# Altium PCB PCB2.PcbDoc
Units mm, origin at the board's own origin, x right, y up, seen from the top; angles counter-clockwise.
Board outline 150.26 x 100.27 mm, 2 copper layers (Top Layer, Bottom Layer); 57 components, 48 nets, 195 pads, 0 vias.
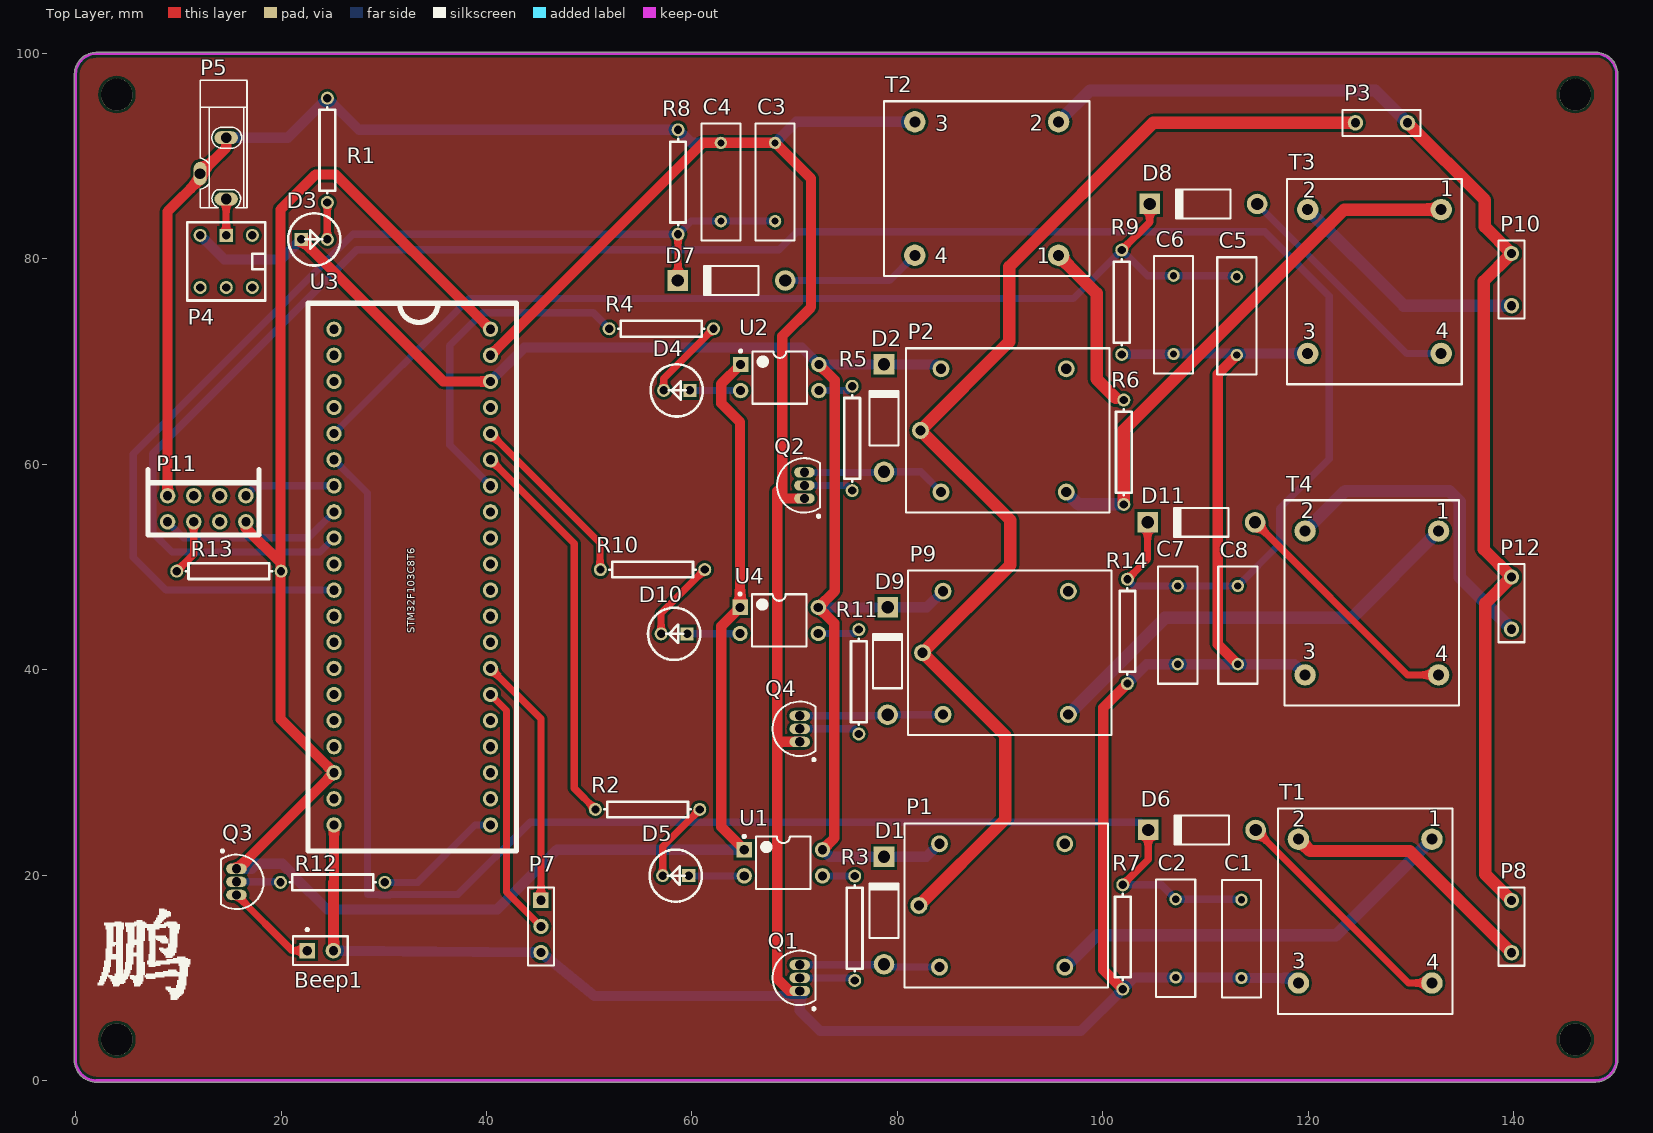
[diagram p0: Top Layer view]
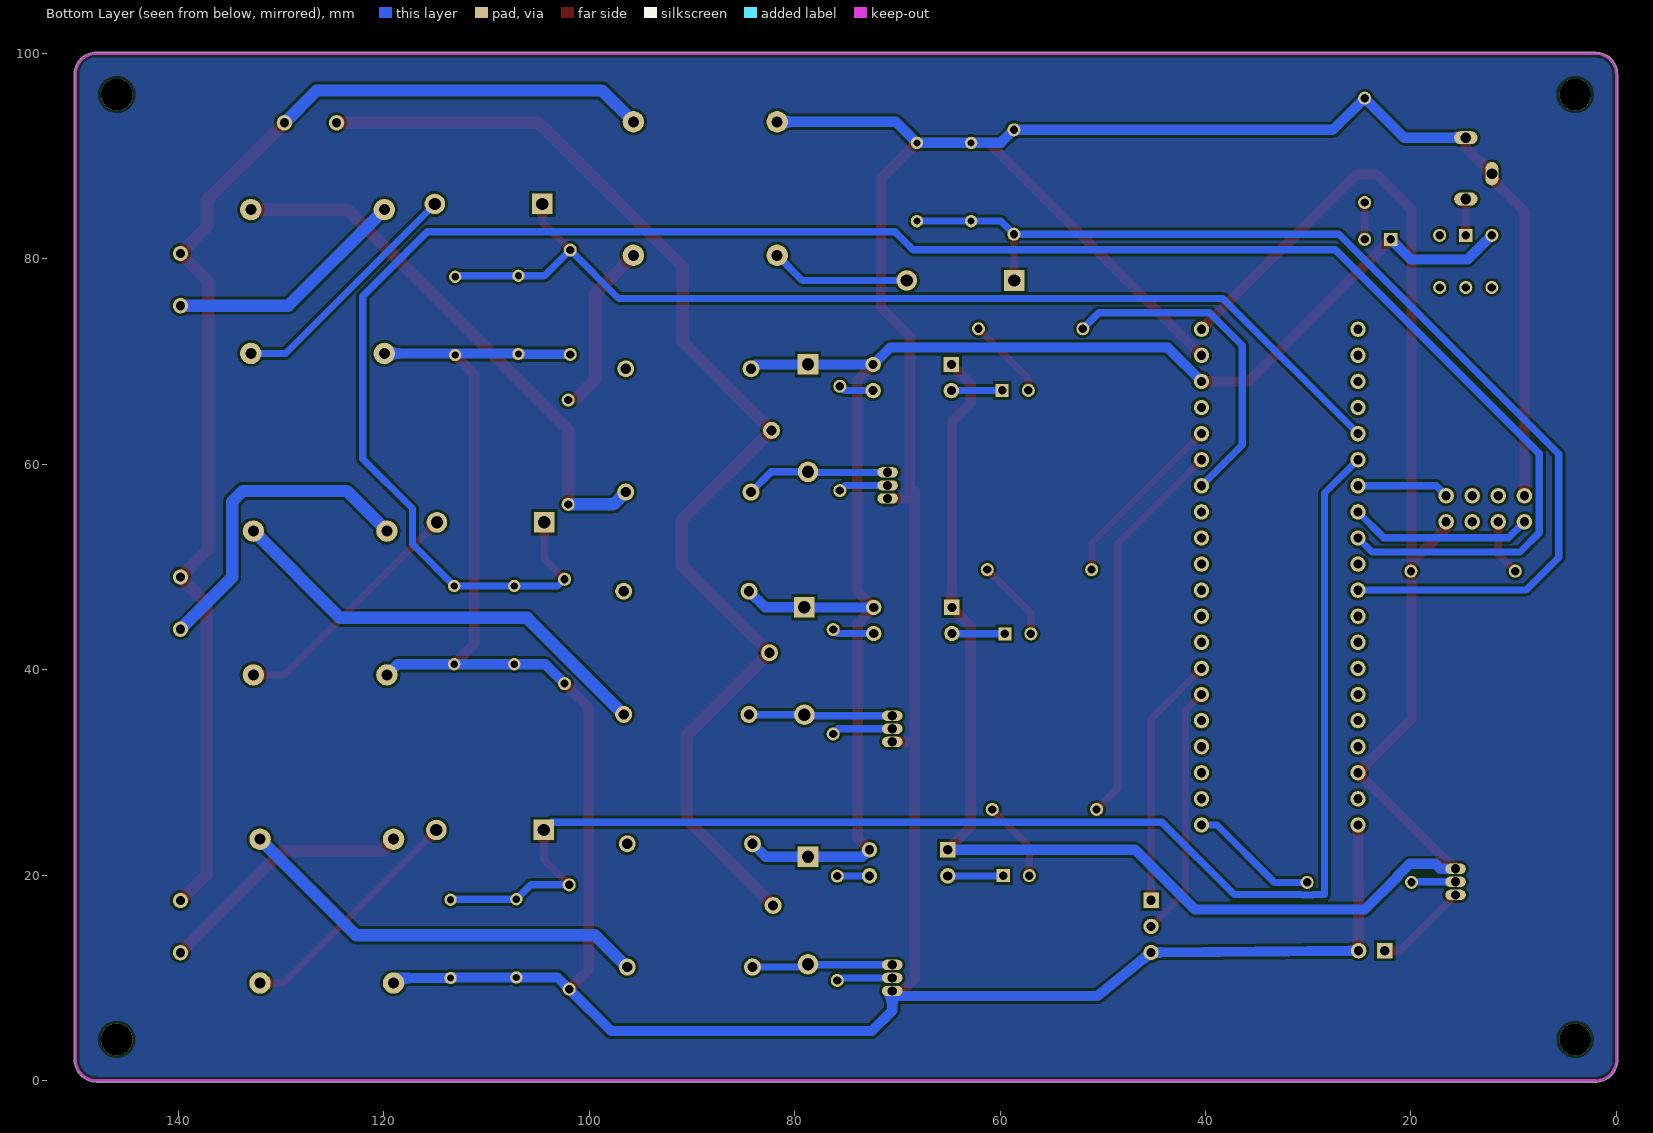
[diagram p1: Bottom Layer view, seen from below]

## Layer stack, top to bottom
Top Solder: solder mask 0.0102, Solder Resist, Dk 3.5
Top Layer: signal copper 0.0356
Dielectric 1: dielectric 0.32, FR-4, Dk 4.8
Bottom Layer: signal copper 0.0356
Bottom Solder: solder mask 0.0102, Solder Resist, Dk 3.5

## Board outline
-0.129,1.976 cw(c-0.001,1.978) -0.128,1.986 cw(c-0.001,1.978) -0.125,2.009 -0.125,97.984 cw(c0.003,97.984) -0.117,98.028 cw(c2.003,97.984) 1.973,100.104 cw(c1.975,99.977) 1.988,100.104 cw(c2.003,99.977) 2.003,100.104 147.991,100.104 cw(c148.031,99.984) 148.033,100.111 cw(c148.003,97.984) 150.13,98.014 cw(c150.002,98.013) 150.13,98.013 cw(c150.002,98.013) 150.129,97.999 cw(c150.003,97.984) 150.13,97.984 150.13,2.032 cw(c150.003,2.032) 150.13,2.024 cw(c147.955,2.057) 150.129,2.011 cw(c150.002,2.003) 150.13,2.003 cw(c150.002,2.003) 150.13,2.001 cw(c147.955,2.032) 147.999,-0.142 cw(c147.955,-0.023) 147.955,-0.15 2.035,-0.15 cw(c2.003,-0.027) 2.001,-0.154 cw(c2.032,2.007)

## Design rules (kind name [scope] priority, off if disabled: settings)
Clearance Clearance_1 [All] p1: gap=0.254
Clearance [All] p2: gap=0.254
HoleSize [All] p1: absolutevalues=TRUE maxlimit=3.5 minlimit=0.025 maxpercent=80.000 minpercent=20.000
HoleToHoleClearance [All] p1 off: gap=0.25 allowstackedmicrovias=TRUE
MinimumSolderMaskSliver [All] p1 off: minsoldermaskwidth=0.25
PolygonConnect [All] p1: connectstyle=Relief reliefconductorwidth=0.254 reliefentries=4 polygonreliefangle="90 Angle" airgapwidth=0.254
RoutingVias [All] p1: holewidth=0.711 width=1.27 viastyle="Through Hole" minholewidth=0.711 minwidth=1.27 maxholewidth=0.711 maxwidth=1.27
SilkToSilkClearance [All] p1 off: silktosilkclearance=0.25
SilkToSolderMaskClearance [IsPad] p1 off: minsilkscreentomaskgap=0.254 clearancetoexposedcopper=TRUE
SolderMaskExpansion [All] p1: expansion=0.25 soldermaskfromhole=TRUE
Width 6_2 [InNet('NetR6_2')] p1: maxlimit=1.2 minlimit=1.2 preferedwidth=1.2
Width 2_4 [InNet('NetP2_4')] p2: maxlimit=1.2 minlimit=1.2 preferedwidth=1.2
Width 1_4 [InNet('NetP1_4')] p3: maxlimit=1.2 minlimit=1.2 preferedwidth=1.2
Width 9_4 [InNet('NetP9_4')] p4: maxlimit=1.2 minlimit=1.2 preferedwidth=1.2
Width VCC [InNet('VCC')] p5: maxlimit=1 minlimit=1 preferedwidth=1
Width 12_1 [InNet('NetP12_1')] p6: maxlimit=1.2 minlimit=1.2 preferedwidth=1.2
Width 10_1 [InNet('NetP10_1')] p7: maxlimit=1.2 minlimit=1.2 preferedwidth=1.2
Width 8_1 [InNet('NetP8_1')] p8: maxlimit=1.2 minlimit=1.2 preferedwidth=1.2
Width 3.3V [InNet('3.3V')] p9: maxlimit=1 minlimit=1 preferedwidth=1
Width N [InNet('N')] p10: maxlimit=1.2 minlimit=1.2 preferedwidth=1.2
Width L [InNet('L')] p11: maxlimit=1.2 minlimit=1.2 preferedwidth=1.2
Width GND [InNet('GND')] p12: maxlimit=1 minlimit=1 preferedwidth=1
Width [All] p13: maxlimit=0.7 minlimit=0.7 preferedwidth=0.7
25 further rules are at their usual default settings.

## Components (designator, comment, footprint, x,y, rotation, side; value= is the part's Value field where it differs from the comment)
Beep1 "Beep" Bell 22.55,12.65 r0 top
C1 "CAP-A" Cap 113.5,13.8 r90 top
C2 "CAP-B" Cap 107.1,13.85 r90 top
C3 "CAP-A" Cap 68.099,87.488 r270 top
C4 "CAP-B" Cap 62.816,87.488 r270 top
C5 "CAP-A" Cap 113.05,74.45 r90 top
C6 "CAP-B" Cap 106.9,74.55 r90 top
C7 "CAP-A" Cap 107.3,44.35 r90 top
C8 "CAP-B" Cap 113.15,44.35 r90 top
D1 "Diode" Diode 78.7,16.55 r90 top
D2 "Diode" Diode 78.7,64.5 r90 top
D3 "LED" LED 24.5,81.9 r0 top
D4 "LED" LED 57.25,67.2 r180 top
D5 "LED" LED 57.15,19.95 r180 top
D6 "Diode" Diode 109.65,24.4 r180 top
D7 "Diode" Diode 63.85,77.9 r180 top
D8 "Diode" Diode 109.8,85.35 r180 top
D9 "Diode" Diode 79.05,40.85 r90 top
D10 "LED" LED 57,43.5 r180 top
D11 "Diode" Diode 109.6,54.35 r180 top
P1 "Relay-5" Relay 84.1,23.05 r0 top
P2 "Relay-5" Relay 84.25,69.3 r0 top
P3 "Header 2" HDR1X2 124.6,93.25 r0 top
P4 "开关" Switch 17.2,82.3 r270 top
P5 "电源插座" DC 14.65,91.8 r270 top
P7 "串口调试接口" HDR1X3 45.3,17.55 r270 top
P8 "Header 2" HDR1X2 139.8,12.45 r90 top
P9 "Relay-5" Relay 84.45,47.65 r0 top
P10 "Header 2" HDR1X2 139.8,75.45 r90 top
P11 "ESP8266" ESP8266 8.95,54.4 r90 top
P12 "Header 2" HDR1X2 139.8,43.95 r90 top
Q1 "NPN" Triode 70.5,10 r180 top
Q2 "NPN" Triode 70.95,57.95 r180 top
Q3 "PNP" Triode 15.65,19.35 r0 top
Q4 "NPN" Triode 70.5,34.25 r180 top
R1 "RES" RES 24.5,95.65 r270 top
R2 "RES" RES 50.6,26.4 r0 top
R3 "RES" RES 75.85,9.75 r90 top
R4 "RES" RES 62.1,73.2 r180 top
R5 "RES" RES 75.6,67.6 r270 top
R6 "RES" RES 102.05,56.1 r90 top
R7 "RES" RES 101.95,8.9 r90 top
R8 "RES" RES 58.65,92.568 r270 top
R9 "RES" RES 101.85,70.7 r90 top
R10 "RES" RES 61.25,49.75 r180 top
R11 "RES" RES 76.25,33.75 r90 top
R12 "RES" RES 30.1,19.3 r180 top
R13 "RES" RES 20,49.6 r180 top
R14 "RES" RES 102.4,38.65 r90 top
T1 "TA1005-1M" Transforme 132.05,23.5 r180 top
T2 "TV1005-1M" Transforme 95.7,80.35 r90 top
T3 "TA1005-1M" Transforme 132.95,84.8 r180 top
T4 "TA1005-1M" Transforme 132.7,53.5 r180 top
U1 "Optoisolator" DIP-4 68.9,21.2 r0 top
U2 "Optoisolator" DIP-4 68.55,68.45 r0 top
U3 "STM32F103C8T6" STM32F103C8T6 25.15,73.15 r0 top
U4 "Optoisolator" DIP-4 68.5,44.8 r0 top

## Footprints (in the part's own frame and the unit in brackets; to place one, negate y for a bottom-side part, rotate by r counter-clockwise, add the part's x,y. Pads: shape width x height; smd on the part's side, far side on the other; paste and mask are expansions set on the pad)
Bell [mm]
  rect 1.5x1.5 hole 0.9: 1(0,0)
  round 1.5 hole 0.9: 2(2.54,0)
  silkscreen extent -1.4,-1.4 3.94,2.17
Cap [mm]
  round 1.2 hole 0.7: 1(-3.81,0) 2(3.81,0)
  silkscreen extent -5.71,-1.91 5.72,1.9
DC [mm]
  oval 1.27x2.286 hole 1.05: 1(5.969,0) 2(0,0)
  oval 2.286x1.27 hole 1.05: 3(3.5,-2.54)
  silkscreen extent -5.59,-2.54 6.81,2.03
Diode [mm]
  round 2 hole 1.2: 1(-5.23,0)
  rect 2x2 hole 1.2: 2(5.23,0)
  silkscreen extent -2.65,-1.4 2.75,1.4
DIP-4 [mm]
  rect 1.5x1.5 hole 0.9: 1(-3.81,1.27)
  round 1.5 hole 0.9: 2(-3.81,-1.27) 3(3.81,-1.27) 4(3.81,1.27)
  silkscreen extent -3.93,-2.55 2.65,2.69, body extent -3.15,-2.5 3.15,2.5, height 5.6
ESP8266 [mm]
  round 1.5 hole 0.9: 1(0,0) 2(0,-2.54) 3(0,-5.08) 4(0,-7.62) 5(2.54,-7.62) 6(2.54,-5.08) 7(2.54,-2.54) 8(2.54,0)
  silkscreen extent -1.27,-8.89 5.08,1.91
HDR1X2 [mm] "Connector; Header; 3 Position"
  round 1.5 hole 0.9: 1(0,0) 2(5.08,0)
  silkscreen extent -1.27,-1.27 6.35,1.27
HDR1X3 [mm] "Connector; Header; 3 Position"
  rect 1.5x1.5 hole 0.9: 1(0,0)
  round 1.5 hole 0.9: 2(2.54,0) 3(5.08,0)
  silkscreen extent -1.27,-1.27 6.35,1.27
LED [mil]
  rect 50x50 hole 32: 1(-100,0)
  round 50 hole 32: 2(0,0)
  silkscreen extent -150,-100 50,100
Relay [mm]
  round 1.65 hole 1: 1(0,-12) 2(0,0) 3(-2,-6) 4(12.2,-12) 5(12.2,0)
  silkscreen extent -3.4,-14 16.4,2, body extent -3.43,-13.97 16.38,2.03, height 14
RES [mm]
  round 1.27 hole 0.8: 1(0,0) 2(10.16,0)
  silkscreen extent 0.89,-0.76 9.27,0.76
STM32F103C8T6 [mm]
  round 1.5 hole 0.9: 1(0,0) 2(0,-2.54) 3(0,-5.08) 4(0,-7.62) 5(0,-10.16) 6(0,-12.7) 7(0,-15.24) 8(0,-17.78) 9(0,-20.32) 10(0,-22.86) 11(0,-25.4) 12(0,-27.94) 13(0,-30.48) 14(0,-33.02) 15(0,-35.56) 16(0,-38.1) 17(0,-40.64) 18(0,-43.18) 19(0,-45.72) 20(0,-48.26) 21(15.24,-48.26) 22(15.24,-45.72) 23(15.24,-43.18) 24(15.24,-40.64) 25(15.24,-38.1) 26(15.24,-35.56) 27(15.24,-33.02) 28(15.24,-30.48) 29(15.24,-27.94) 30(15.24,-25.4) 31(15.24,-22.86) 32(15.24,-20.32) 33(15.24,-17.78) 34(15.24,-15.24) 35(15.24,-12.7) 36(15.24,-10.16) 37(15.24,-7.62) 38(15.24,-5.08) 39(15.24,-2.54) 40(15.24,0)
  silkscreen extent -2.54,-50.8 17.78,2.54
Switch [mm]
  round 1.27 hole 0.8: 1(0,0) 3(0,-5.08) 4(5.08,-5.08) 5(5.08,-2.54) 6(5.08,0)
  rect 1.27x1.27 hole 0.8: 2(0,-2.54)
  silkscreen extent -1.27,-6.35 6.35,1.27
Transforme [mil]
  round 82 hole 42: 1(0,0) 2(511.81,0) 3(511.81,551.18) 4(0,551.18)
  silkscreen extent -79,-118 591,669
Triode [mm]
  oval 2x1 hole 0.9: 1(0,1.27) 2(0,0) 3(0,-1.27)
  silkscreen extent -1.52,-2.65 2.65,3.13

## Part data
Beep1: library part Bell, "蜂鸣器"
C1 C3 C5 C7: "电解电容"
C2 C4 C6 C8: "瓷片电容"
D1 D2 D6 D7 D8 D9 D11: "整流二极管"
P1 P2 P9: "5针继电器"
P3 P8 P10 P12: "两孔端子"
P4: library part Switch
P5: library part POWER, "DC电源插口"
P7: library part "Header 3", "Header, 3-Pin"
P11: "WIFI模块（8针）"
R1 R2 R3 R4 R5 R6 R7 R8 R9 R10 R11 R12 R13 R14: "电阻"
T1 T3 T4: library part Transforme-A, "电流互感器"
T2: library part Transforme-V, "电压互感器"
U1 U2 U4: "光耦隔离器"
U3: "STM32最小系统（40针）"

## Free pads (board coordinates)
  round 3.1 hole 3.1: 1(4.003,96.003) 2(4.003,4.003) 4(146.003,96.003)
  round 3.1 hole 3.1 paste+0: 3(146.003,4.003)

## Nets (pads, with @x,y where several pads share a name; then routed paths per layer and width w, separated by ;. In a path a pad name is that pad's centre, name@x,y a point inside that pad or via, vN(x,y) a via of type N, cw(c..) or ccw(c..) an arc to the next point about the centre after c; other vN are vias at no path point)
3.3V: P11.4 Q3.1 R13.1 U1.1 U2.1 U3.18 U3.40 U4.1 | length 208.3
  Top Layer w1: Q3.1 15.8,20.62 U3.18 19.95,35.17 19.95,50.4 ; P11.4 16.57,53.78 19.95,50.4 ; U3.40 25.326,88.214 23.343,88.214 19.95,84.822 19.95,50.4 ; U2.1 62.85,67.83 62.85,65.953 64.69,64.113 U4.1 62.85,44.23 62.85,24.71 U1.1
  Bottom Layer w1: Q3.1 17.155,20.62 17.635,21.1 20.104,21.1 21.329,19.875 21.329,19.799 24.466,16.662 41.046,16.662 46.854,22.47 U1.1
BEEP: R12.1 U3.21 | length 12.6
  Bottom Layer w0.7: R12.1 33.3,19.3 38.89,24.89 U3.21
GND: Beep1.2 C1.1 C2.1 C3.1 C4.1 C5.1 C6.1 C7.1 C8.1 P5.2 P5.3 P7.3 P11.8 Q1.1 Q2.1 Q4.1 R1.1 R7.1 R8.1 R9.1 R14.1 T1.3 T2.3 T3.3 T4.3 U3.20 U3.39 | length 456.1
  Top Layer w1: P11.8 8.95,84.622 12.11,87.782 P5.3 14.65,90.84 P5.2 ; Beep1.2 25.09,19.254 25.14,19.304 ; Beep1.2@25.14,12.65 25.14,19.304 ; U3.20 25.15,19.314 25.14,19.304 ; U3.39 61.078,91.298 C4.1 C3.1 71.6,87.797 71.6,75.308 68.783,72.492 68.783,56.9 ; 68.783,32.98 Q4.1 ; Q1.1 69.525,8.73 69.509,8.746 69.481,8.746 68.3,9.927 68.3,57.383 69.003,56.68 Q2.1 ; R7.1 100.05,10.8 100.05,36.3 R14.1 ; C5.1 111.2,68.79 111.2,42.49 C8.1
  Bottom Layer w1: P5.2 20.65,91.8 R1.1 27.582,92.568 R8.1 59.92,91.298 C4.1 C3.1 70.151,93.35 T2.3 ; Beep1.2 P7.3 50.515,8.23 70,8.23 Q1.1 70.5,6.818 72.492,4.826 97.876,4.826 R7.1 103.09,10.04 107.75,10.03 C1.1@113.45,10.03 ; R9.1 C6.1 ; R14.1 104.29,40.54 C7.1 C8.1 118.66,40.54 T4.3 ; C6.1@106.9,70.8 T3.3 ; C1.1 118.56,9.99 T1.3
IT1: C5.2 C6.2 D8.2 R9.2 U3.5 | length 102
  Top Layer w0.7: R9.2 104.57,83.58 D8.2
  Bottom Layer w0.7: U3.5 38.31,76.15 97.14,76.15 R9.2 104.35,78.36 C6.2 112.95,78.36 C5.2
IT2: C1.2 C2.2 D6.2 R7.2 U3.6 | length 141.5
  Top Layer w0.7: R7.2 104.42,21.53 D6.2
  Bottom Layer w0.7: U3.6 28.4,57.2 28.4,18.11 29.538,18.11 29.587,18.061 30.613,18.061 30.662,18.11 37.21,18.11 44.25,25.15 103.72,25.15 D6.2@104.42,24.45 ; R7.2 105.7,19.06 C2.2 113.5,17.66 C1.2
IT3: C7.2 C8.2 D11.2 R14.2 U3.9 | length 202.1
  Top Layer w0.7: R14.2 104.37,50.78 D11.2
  Bottom Layer w0.7: U3.9 23.78,51.46 9.373,51.46 7.5,53.333 7.5,61.04 27.359,80.899 68.478,80.899 70.229,82.65 115.775,82.65 122.05,76.375 122.05,60.531 117.221,55.702 117.221,52.231 C8.2 C7.2 103.05,48.16 R14.2
L: P1.3 P2.3 P3.1 P9.3 | length 119.3
  Top Layer w1.2: P1.3 90.5,25.45 90.5,33.6 P9.3 91,50.2 91,54.55 P2.3 90.9,71.95 90.9,79.241 104.909,93.25 P3.1
N: P3.2 P8.2 P10.2 P12.2 T2.2 | length 120.8
  Top Layer w1.2: P3.2 137.2,85.73 137.2,83.13 P10.2 137.1,77.83 137.1,51.73 P12.2 137.25,46.48 137.25,20.08 P8.2
  Bottom Layer w1.2: T2.2 98.75,96.4 126.53,96.4 P3.2
NetBeep1_1: Beep1.1 Q3.3 | length 9.1
  Top Layer w0.7: Q3.3 21.08,12.65 Beep1.1
NetD1_1: D1.1 P1.1 Q1.3 | length 13.7
  Bottom Layer w0.7: Q1.3 78.65,11.27 D1.1 78.97,11.05 P1.1
NetD2_1: D2.1 P2.1 Q2.3 | length 14.1
  Bottom Layer w0.7: Q2.3 78.65,59.22 D2.1 82.28,59.27 P2.1
NetD3_2: D3.2 R1.2 | length 7.2
  Top Layer w0.7: D3.2 R1.2 D3.2
NetD4_1: D4.1 U2.2 | length 5
  Bottom Layer w0.7: D4.1 59.81,67.18 U2.2
NetD4_2: D4.2 R4.1 | length 8
  Top Layer w0.7: D4.2 57.25,68.35 R4.1
NetD5_1: D5.1 U1.2 | length 5.4
  Bottom Layer w0.7: D5.1 59.71,19.93 U1.2
NetD5_2: D5.2 R2.2 | length 7.9
  Top Layer w0.7: D5.2 57.15,22.79 R2.2
NetD6_1: D6.1 T1.4 | length 23.3
  Top Layer w0.7: D6.1 129.78,9.5 T1.4
NetD7_1: D7.1 T2.4 | length 13.6
  Bottom Layer w0.7: D7.1 79.25,77.9 T2.4
NetD8_1: D8.1 T3.4 | length 23.9
  Bottom Layer w0.7: D8.1 129.58,70.8 T3.4
NetD9_1: D9.1 P9.1 Q4.3 | length 14.1
  Bottom Layer w0.7: Q4.3 D9.1@79.15,35.52 ; D9.1 84.42,35.62 P9.1
NetD10_1: D10.1 U4.2 | length 5.1
  Bottom Layer w0.7: D10.1 U4.2@64.66,43.5
NetD10_2: D10.2 R10.1 | length 8
  Top Layer w0.7: D10.2 57,45.5 R10.1
NetD11_1: D11.1 T4.4 | length 24
  Top Layer w0.7: D11.1 129.68,39.5 T4.4
NetP1_4: P1.4 T1.1 | length 40.9
  Bottom Layer w1.2: P1.4 96.35,11.05 99.45,14.15 122.7,14.15 T1.1
NetP2_4: P2.4 R6.1 T3.1 | length 53.1
  Top Layer w1.2: R6.1 102.05,63.34 123.51,84.8 T3.1
  Bottom Layer w1.2: P2.4 97.65,56.1 R6.1
NetP4_2: P4.2 P5.1 | length 3.5
  Top Layer w0.7: P4.2@14.65,82.3 P5.1
NetP7_1: P7.1 U3.27 | length 24.6
  Top Layer w0.7: U3.27 45.3,35.22 P7.1
NetP7_2: P7.2 U3.26 | length 24.6
  Top Layer w0.7: U3.26 41.95,36.03 41.95,18.36 P7.2
NetP8_1: P8.1 T1.2 | length 25.3
  Top Layer w1.2: T1.2 120.193,22.357 129.893,22.357 P8.1
NetP9_4: P9.4 T4.1 | length 43.4
  Bottom Layer w1.2: P9.4 106.05,45.05 124.25,45.05 T4.1
NetP10_1: P10.1 T3.2 | length 23.7
  Bottom Layer w1.2: T3.2 129.3,75.45 P10.1
NetP11_2: P11.2 R13.2 | length 5.5
  Top Layer w0.7: R13.2 10.215,49.975 11.49,51.25 P11.2
NetP12_1: P12.1 T4.2 | length 31.6
  Bottom Layer w1.2: T4.2 123.6,57.4 133.735,57.4 134.772,56.363 134.772,48.978 P12.1
NetQ1_2: Q1.2 R3.1 | length 5.5
  Bottom Layer w0.7: Q1.2 75.6,10 R3.1
NetQ2_2: Q2.2 R5.2 | length 4.9
  Bottom Layer w0.7: Q2.2 75.09,57.95 R5.2
NetQ3_2: Q3.2 R12.2 | length 4.3
  Bottom Layer w0.7: Q3.2 19.89,19.35 R12.2
NetQ4_2: Q4.2 R11.1 | length 6
  Bottom Layer w0.7: Q4.2 75.75,34.25 R11.1
NetR3_2: R3.2 U1.3 | length 2.5
  Bottom Layer w0.7: U1.3 75.2,19.93
NetR5_1: R5.1 U2.3 | length 3.4
  Bottom Layer w0.7: U2.3 75.18,67.18 R5.1
NetR6_2: R6.2 T2.1 | length 16.2
  Top Layer w1.2: T2.1 99.4,76.65 99.4,68.31 101.25,66.46
NetR11_2: R11.2 U4.3 | length 4.1
  Bottom Layer w0.7: U4.3 75.87,43.53 R11.2
PA2: P11.5 U3.7 | length 9
  Bottom Layer w0.7: P11.5 17.54,57.91 U3.7
PA3: P11.1 U3.8 | length 17.9
  Bottom Layer w0.7: P11.1 10.493,52.857 22.637,52.857 U3.8
PB6: R4.2 U3.34 | length 32.8
  Bottom Layer w0.7: U3.34 36.424,61.876 36.424,71.577 39.596,74.75 50.39,74.75 R4.2
PB7: R2.1 U3.35 | length 38.3
  Top Layer w0.7: U3.35 48.539,52.301 48.539,28.461 R2.1
PB8: R10.2 U3.36 | length 17.4
  Top Layer w0.7: U3.36 51.04,52.34 51.04,50.1 R10.2@51.09,50.05
UT: C3.2 C4.2 D7.2 R8.2 U3.11 | length 107.3
  Top Layer w0.7: D7.2@58.65,77.9 R8.2
  Bottom Layer w0.7: U3.11 8.79,47.75 5.6,50.94 5.6,61 27.008,82.408 R8.2 59.92,83.678 C4.2 C3.2
VCC: D1.2 D2.2 D3.1 D9.2 P1.2 P2.2 P4.3 P9.2 U1.4 U2.4 U3.38 U4.4 | length 156.3
  Top Layer w1: D3.1 35.79,68.07 U3.38 ; U2.4 73.9,68.18 73.9,47.66 U4.4 73.85,44.53 73.85,23.61 U1.4 ; D1.2 D1.2@78.7,21.95
  Bottom Layer w1: P4.3 14.47,79.95 20.01,79.95 D3.1 ; U3.38 43.685,71.365 70.715,71.365 U2.4 78.69,69.72 D2.2 83.82,69.73 P2.2 ; U4.4 78.69,46.07 D9.2@78.7,46.08 ; U1.4 73.4,21.78 D1.2 82.83,21.78 P1.2 ; D9.2 82.88,46.08 P9.2
pads on no net: P1.5 P2.5 P4.1 P4.4 P4.5 P4.6 P9.5 P11.3 P11.6 P11.7 U3.1 U3.2 U3.3 U3.4 U3.10 U3.12 U3.13 U3.14 U3.15 U3.16 U3.17 U3.19 U3.22 U3.23 U3.24 U3.25 U3.28 U3.29 U3.30 U3.31 U3.32 U3.33 U3.37

## Polygon pours and split planes (outlines as drawn)
no net on Bottom Layer "Top Layer Net" (solid, pour order 6): -0.15,-0.2 -0.15,100.15 150.15,100.15 150.15,-0.2 -0.15,-0.2
no net on Top Layer "Top Layer Net" (solid, pour order 8): -0.15,-0.2 -0.15,100.15 150.15,100.15 150.15,-0.2 -0.15,-0.2

## Keep-outs
Keep-Out Layer:
  lines w0.254: -0.001,2.003 ccw(c2.032,2.032) 2.003,-0.001 ; 0.003,1.978 0.003,97.984 ; 0.01,98.012 cw(c2.003,97.984) 1.975,99.977 ; 2.003,0.003 147.955,0.003 ; 2.003,99.977 148.003,99.977 ; 147.984,0.01 ccw(c147.955,2.057) 150.002,2.028 ; 148.031,99.984 cw(c148.003,97.984) 150.002,98.013 ; 150.003,2.057 150.003,97.984

## Silkscreen, mask and mechanical layers (free items; w line width, h text height)
Top Overlay:
  drawing of 281 lines, arcs and shapes, not listed
Mechanical 1:
  lines w0.254: -0.001,1.978 ccw(c2.032,2.007) 2.003,-0.027 ; 0.003,1.978 0.003,97.984 ; 0.01,98.012 cw(c2.003,97.984) 1.975,99.977 ; 2.003,-0.003 147.955,-0.003 ; 2.003,99.977 148.003,99.977 ; 147.984,-0.015 ccw(c147.955,2.032) 150.002,2.003 ; 148.031,99.984 cw(c148.003,97.984) 150.002,98.013 ; 150.003,2.032 150.003,97.978

## Text inside footprints (layer, text, board x,y; h text height)
T1: Top Overlay "1" at 131.7,24.75 h1.5; Top Overlay "2" at 118.45,24.7 h1.5; Top Overlay "4" at 131.5,10.8 h1.5; Top Overlay "3" at 118.45,10.9 h1.5
T2: Top Overlay "1" at 93.55,79.6 h1.5; Top Overlay "2" at 92.9,92.5 h1.5; Top Overlay "4" at 83.65,79.6 h1.5; Top Overlay "3" at 83.7,92.45 h1.5
T3: Top Overlay "1" at 132.85,86.1 h1.5; Top Overlay "2" at 119.45,85.95 h1.5; Top Overlay "4" at 132.4,72.3 h1.5; Top Overlay "3" at 119.45,72.2 h1.5
T4: Top Overlay "1" at 132.45,54.7 h1.5; Top Overlay "2" at 119.3,54.75 h1.5; Top Overlay "4" at 132.35,40.85 h1.5; Top Overlay "3" at 119.45,41 h1.5